# Altium PCB PDB_Rev1.PcbDoc (part 2 of 2)
Units mil, origin at the board's own origin, x right, y up, seen from the top; angles counter-clockwise.
Board outline 7157 x 4373 mil, 4 copper layers (Top Layer, Int1 (GND), Int2 (PWR), Bottom Layer), stack 53.912 mil thick; 59 components, 21 nets, 135 pads, 0 vias.
Unrouted connection lines stored in the file: 51.
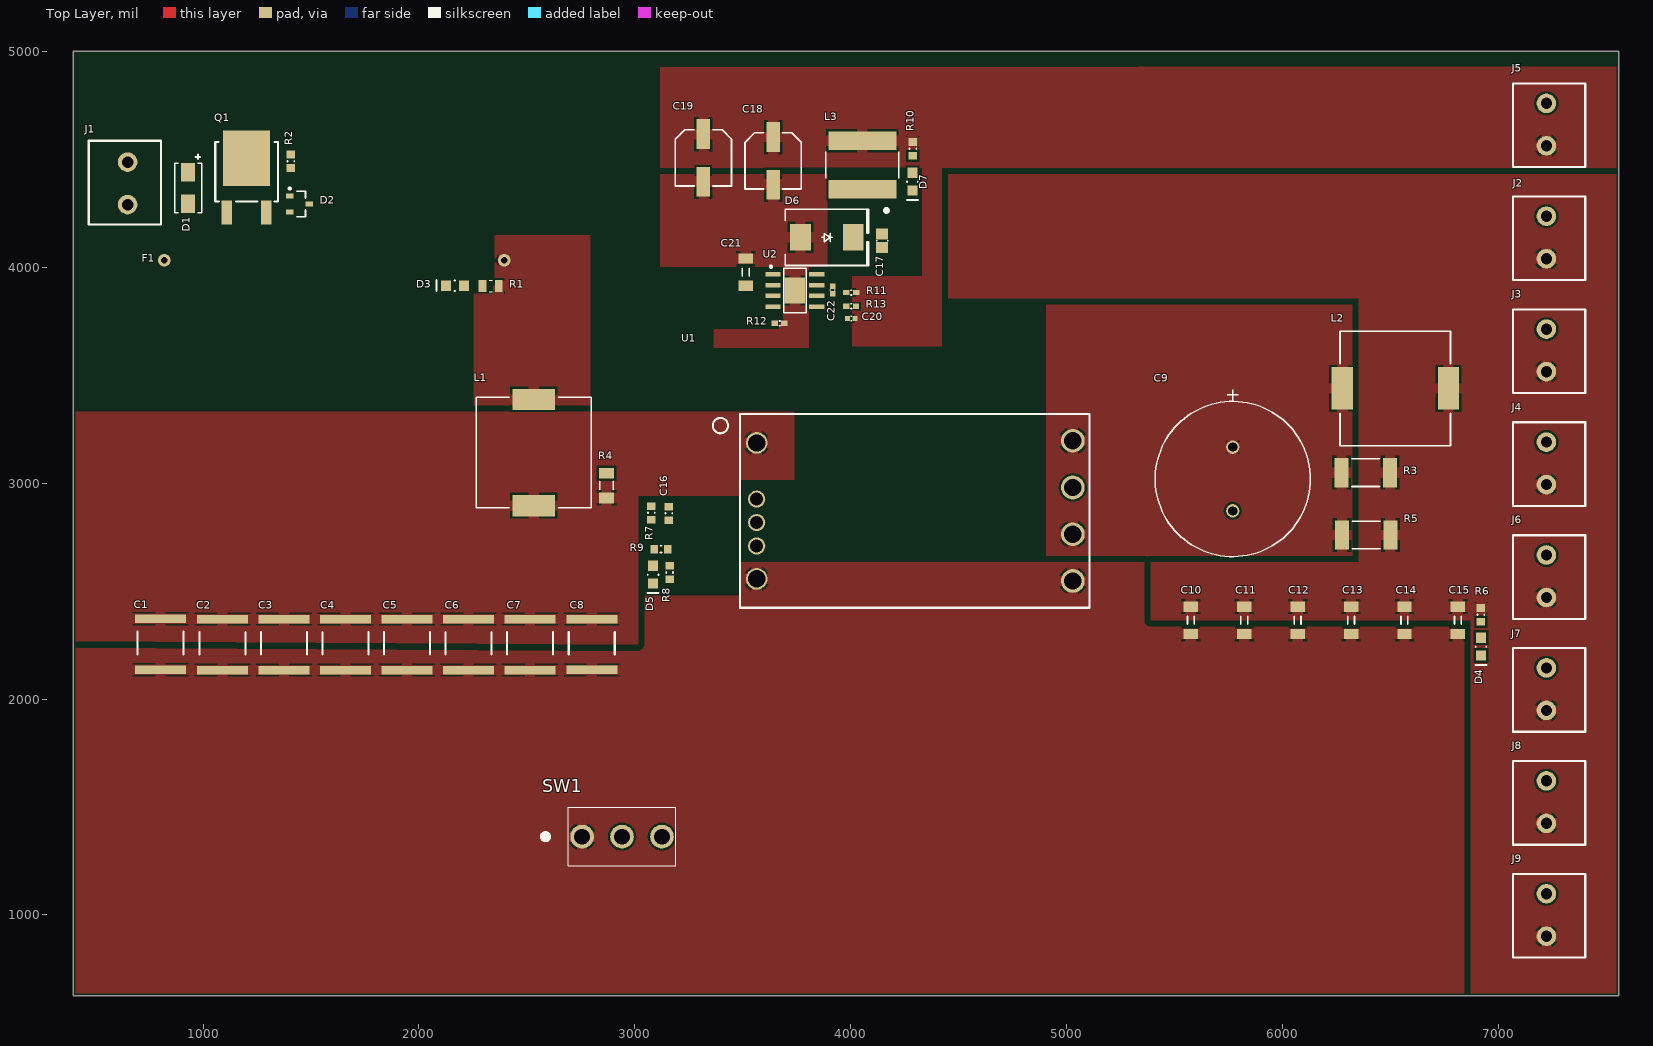
[diagram p0: Top Layer view]

## Part data (continued)
R11: "RES SMD 221K OHM 1% 1/10W 0402", Case/Package=0402, Case Code (Metric)=1005, Manufacturer 1=Panasonic, Max Operating Temperature=155°C, Max Power Dissipation=100mW, Min Operating Temperature=-55°C, Package Quantity=1, Resistance=221kO, Supplier Part Number 1=P221KLCT-ND, Temperature Coefficient=100ppm/°C, Tolerance=1%, Voltage Rating=50V, Case Code (Imperial)=0402, ComponentLink1Description=https://datasheet.ciiva.com/43467/1678782-43467510.pdf?src-supplier=Farnell, ComponentLink1URL=https://datasheet.ciiva.com/43467/1678782-43467510.pdf?src-supplier=Farnell, ComponentLink2Description=https://datasheet.ciiva.com/7712/1678782-7712808.pdf?src-supplier=Element14, ComponentLink2URL=https://datasheet.ciiva.com/7712/1678782-7712808.pdf?src-supplier=Element14, ComponentLink3Description=https://datasheet.ciiva.com/9184/aoa0000ce2-9184216.pdf?src-supplier=Avnet, ComponentLink3URL=https://datasheet.ciiva.com/9184/aoa0000ce2-9184216.pdf?src-supplier=Avnet, ComponentLink4Description=https://datasheet.ciiva.com/16514/aoa0000ce2-16514280.pdf?src-supplier=Avnet+Asia, ComponentLink4URL=https://datasheet.ciiva.com/16514/aoa0000ce2-16514280.pdf?src-supplier=Avnet+Asia, ComponentLink5Description=https://datasheet.ciiva.com/46373/1678782-46373065.pdf?src-supplier=Element14, ComponentLink5URL=https://datasheet.ciiva.com/46373/1678782-46373065.pdf?src-supplier=Element14, ComponentLink6Description=https://datasheet.ciiva.com/46373/1678782-46373066.pdf?src-supplier=Element14, ComponentLink6URL=https://datasheet.ciiva.com/46373/1678782-46373066.pdf?src-supplier=Element14, ComponentLink7Description=https://datasheet.ciiva.com/16777/70260748-16777838.pdf?src-supplier=Allied+Electronics, ComponentLink7URL=https://datasheet.ciiva.com/16777/70260748-16777838.pdf?src-supplier=Allied+Electronics, ComponentLink8Description=https://datasheet.ciiva.com/24026/aoa0000ce2-24026895.pdf?src-supplier=Mouser, ComponentLink8URL=https://datasheet.ciiva.com/24026/aoa0000ce2-24026895.pdf?src-supplier=Mouser, Composition="Thick Film", Contact Plating=Tin, Depth=0.5mm, Features="Automotive AEC-Q200", Height=0.016inch, Lead Free="Lead Free", Length=1mm, Manufacturer Part Number 1=ERJ-2RKF2213X, Military Standard=Not, Mount="Surface Mount", Number of Terminations=2, Packaging="Tape and Reel", Power Rating=100mW, Pricing 1="1=0.10000, 10=0.04100, 100=0.01660, 1000=0.00745, 2500=0.00646, 5000=0.00534 (USD)", REACH SVHC="No SVHC", RoHS=Yes, Stock 1=643641, Supplier 1=Digi-Key, Termination=SMD/SMT, Voltage Rating (DC)=50V, Width=0.02inch
R12: "RES SMD 13.7K OHM 1% 1/16W 0402", Case/Package=0402, Case Code (Metric)=1005, Manufacturer 1=Vishay, Max Operating Temperature=155°C, Min Operating Temperature=-55°C, Package Quantity=10000, Power Rating=63mW, Resistance=13.7kO, Supplier Part Number 1=541-13.7KLCT-ND, Temperature Coefficient=100ppm/°C, Tolerance=1%, Voltage Rating=50V, Case Code (Imperial)=0402, ComponentLink1Description=https://datasheet.ciiva.com/7664/1533075-7664006.pdf?src-supplier=Element14, ComponentLink1URL=https://datasheet.ciiva.com/7664/1533075-7664006.pdf?src-supplier=Element14, ComponentLink2Description=https://datasheet.ciiva.com/5561/dcrcwe3-109170-5561994.pdf?src-supplier=Mouser, ComponentLink2URL=https://datasheet.ciiva.com/5561/dcrcwe3-109170-5561994.pdf?src-supplier=Mouser, ComponentLink3Description=https://datasheet.ciiva.com/16775/70201119-16775342.pdf?src-supplier=Allied+Electronics, ComponentLink3URL=https://datasheet.ciiva.com/16775/70201119-16775342.pdf?src-supplier=Allied+Electronics, ComponentLink4Description=https://datasheet.ciiva.com/22871/70201119-22871774.pdf?src-supplier=Allied+Electronics, ComponentLink4URL=https://datasheet.ciiva.com/22871/70201119-22871774.pdf?src-supplier=Allied+Electronics, ComponentLink5Description=https://datasheet.ciiva.com/7663/1697337-7663831.pdf?src-supplier=Element14, ComponentLink5URL=https://datasheet.ciiva.com/7663/1697337-7663831.pdf?src-supplier=Element14, Composition="Thick Film", Contact Plating=Tin, Depth=0.5mm, Height=0.35mm, Lead Free="Lead Free", Length=1mm, Manufacturer Part Number 1=CRCW040213K7FKED, Military Standard=Not, Number of Pins=2, Packaging="Tape and Reel", Pricing 1="1=0.10000, 10=0.03600, 100=0.01460, 1000=0.00657, 2500=0.00570, 5000=0.00471 (USD)", Radiation Hardening=No, REACH SVHC=Unknown, RoHS=Yes, Stock 1=47823, Supplier 1=Digi-Key, Termination=SMD/SMT, Voltage Rating (DC)=50V, Weight=2.3E-05oz, Width=0.5mm
R13: "RES SMD 10.2K OHM 1% 1/16W 0402", Case/Package=0402, Case Code (Metric)=1005, Manufacturer 1=Vishay, Max Operating Temperature=155°C, Max Power Dissipation=63mW, Min Operating Temperature=-55°C, Package Quantity=10, Resistance=10.2kO, Supplier Part Number 1=541-10.2KLCT-ND, Temperature Coefficient=100ppm/°C, Tolerance=1%, Voltage Rating=50V, Case Code (Imperial)=0402, ComponentLink1Description=https://datasheet.ciiva.com/11810/0900766b80d98824-11810045.pdf?src-supplier=RSComponents, ComponentLink1URL=https://datasheet.ciiva.com/11810/0900766b80d98824-11810045.pdf?src-supplier=RSComponents, ComponentLink2Description=https://datasheet.ciiva.com/2525/dcrcwe3-2525638.pdf?src-supplier=Digi-Key, ComponentLink2URL=https://datasheet.ciiva.com/2525/dcrcwe3-2525638.pdf?src-supplier=Digi-Key, ComponentLink3Description=https://datasheet.ciiva.com/7369/1635184-7369334.pdf?src-supplier=Newark, ComponentLink3URL=https://datasheet.ciiva.com/7369/1635184-7369334.pdf?src-supplier=Newark, ComponentLink4Description=https://datasheet.ciiva.com/7663/1697337-7663814.pdf?src-supplier=Element14, ComponentLink4URL=https://datasheet.ciiva.com/7663/1697337-7663814.pdf?src-supplier=Element14, ComponentLink5Description=https://datasheet.ciiva.com/2525/dcrcwe3-2525639.pdf?src-supplier=Digi-Key, ComponentLink5URL=https://datasheet.ciiva.com/2525/dcrcwe3-2525639.pdf?src-supplier=Digi-Key, ComponentLink6Description=https://datasheet.ciiva.com/7663/1697337-7663815.pdf?src-supplier=Element14, ComponentLink6URL=https://datasheet.ciiva.com/7663/1697337-7663815.pdf?src-supplier=Element14, ComponentLink7Description=https://datasheet.ciiva.com/2525/dcrcwe3-2525640.pdf?src-supplier=Digi-Key, ComponentLink7URL=https://datasheet.ciiva.com/2525/dcrcwe3-2525640.pdf?src-supplier=Digi-Key, ComponentLink8Description=https://datasheet.ciiva.com/16881/dcrcwe3-16881433.pdf?src-supplier=Avnet+Europe, ComponentLink8URL=https://datasheet.ciiva.com/16881/dcrcwe3-16881433.pdf?src-supplier=Avnet+Europe, ComponentLink9Description=https://datasheet.ciiva.com/7743/125364-7743418.pdf?src-supplier=Element14, ComponentLink9URL=https://datasheet.ciiva.com/7743/125364-7743418.pdf?src-supplier=Element14, ComponentLink10Description=https://datasheet.ciiva.com/22870/70201119-22870522.pdf?src-supplier=Allied+Electronics, ComponentLink10URL=https://datasheet.ciiva.com/22870/70201119-22870522.pdf?src-supplier=Allied+Electronics, ComponentLink11Description=https://datasheet.ciiva.com/16772/70201119-16772093.pdf?src-supplier=Allied+Electronics, ComponentLink11URL=https://datasheet.ciiva.com/16772/70201119-16772093.pdf?src-supplier=Allied+Electronics, ComponentLink12Description=https://datasheet.ciiva.com/3255/dcrcwe3-3255966.pdf?src-supplier=Avnet, ComponentLink12URL=https://datasheet.ciiva.com/3255/dcrcwe3-3255966.pdf?src-supplier=Avnet, ComponentLink13Description=https://datasheet.ciiva.com/16394/dcrcwe3-16394143.pdf?src-supplier=Future+Electronics, ComponentLink13URL=https://datasheet.ciiva.com/16394/dcrcwe3-16394143.pdf?src-supplier=Future+Electronics, ComponentLink14Description=https://datasheet.ciiva.com/22702/1697337-22702863.pdf?src-supplier=Element14, ComponentLink14URL=https://datasheet.ciiva.com/22702/1697337-22702863.pdf?src-supplier=Element14, Composition="Thick Film", Contact Plating=Tin, Depth=0.5mm, Features="Automotive AEC-Q200", Height=0.35mm, Length=1mm, Manufacturer Part Number 1=CRCW040210K2FKED, Military Standard=Not, Mount="Surface Mount", Number of Pins=2, Number of Terminations=2, Packaging="Tape and Reel", Power Rating=63mW, Pricing 1="1=0.10000, 10=0.03600, 100=0.01460, 1000=0.00657, 2500=0.00570, 5000=0.00471 (USD)", Radiation Hardening=No, REACH SVHC=Unknown, RoHS=Yes, Stock 1=5325, Supplier 1=Digi-Key, Termination=SMD/SMT, Weight=2.3E-05oz, Width=0.5mm
SW1: "SWITCH TOGGLE SPDT 5A 120V", Current Rating=5A, Manufacturer 1=E-Switch, Manufacturer Part Number 1=100SP1T1B4M2QE, Max Operating Temperature=85°C, Min Operating Temperature=-30°C, Package Quantity=1, Supplier Part Number 1=EG2355-ND, Voltage Rating (AC)=120V, Voltage Rating (DC)=28V, Actuator Length=12.19mm, Actuator Material=Brass,Chrome, Actuator Type="Standard Round", ComponentLink1Description=https://datasheet.ciiva.com/24455/t111597-24455739.pdf?src-supplier=Onlinecomponents.com, ComponentLink1URL=https://datasheet.ciiva.com/24455/t111597-24455739.pdf?src-supplier=Onlinecomponents.com, ComponentLink2Description=https://datasheet.ciiva.com/2905/t111597-2905494.pdf?src-supplier=Digi-Key, ComponentLink2URL=https://datasheet.ciiva.com/2905/t111597-2905494.pdf?src-supplier=Digi-Key, Contact Material=Silver, Contact Plating=Silver, Electrical Life=40000Cycles, Illumination Type=Non-Illuminated,Illuminated, Lead Free="Lead Free", Mount="Through Hole", Orientation=Vertical, Packaging=Bulk, Pricing 1="1=1.99000, 10=1.77900, 25=1.68240, 50=1.60200, 100=1.52950, 250=1.46512, 500=1.36850, 1000=1.30410 (USD)", RoHS=Yes, Stock 1=4845, Supplier 1=Digi-Key, Switch Function=On-On, Termination="PC Pin", Throw Configuration=SPDT
U2: "Buck, 40V, 5A  2.2MHz Step-Down Regulator with 40µA IQ 8-SO PowerPAD -40 to 125", Case/Package=8-PowerSOIC, Manufacturer 1="Texas Instruments", Max Input Voltage=40V, Max Operating Temperature=125°C, Max Output Voltage=28V, Min Input Voltage=4V, Min Operating Temperature=-40°C, Min Output Voltage=800mV, Output Current=5A, Quiescent Current=40uA, Supplier Part Number 1=296-44322-1-ND, Switching Frequency=2.5MHz, ComponentLink1Description=http://www.ti.com/general/docs/lit/getliterature.tsp?genericPartNumber=LMR14050&&fileType=pdf&src-supplier=Avnet, ComponentLink1URL=http://www.ti.com/general/docs/lit/getliterature.tsp?genericPartNumber=LMR14050&&fileType=pdf&src-supplier=Avnet, ComponentLink2Description=http://www.ti.com/lit/ds/symlink/lmr14050.pdf?src-supplier=Digi-Key, ComponentLink2URL=http://www.ti.com/lit/ds/symlink/lmr14050.pdf?src-supplier=Digi-Key, ComponentLink3Description=http://www.ti.com/general/docs/suppproductinfo.tsp?distId=10&amp;gotoUrl=http%3A%2F%2Fwww.ti.com%2Flit%2Fgpn%2Flmr14050&src-supplier=Digi-Key, ComponentLink3URL=http://www.ti.com/general/docs/suppproductinfo.tsp?distId=10&amp;gotoUrl=http%3A%2F%2Fwww.ti.com%2Flit%2Fgpn%2Flmr14050&src-supplier=Digi-Key, Lead Free="Lead Free", Manufacturer Part Number 1=LMR14050SDDAR, Mount="Surface Mount", Number Of Outputs=1, Number of Pins=8, Output Configuration=Positive, Output Type=Adjustable, Packaging="Cut Tape", Pricing 1="1=2.80000, 10=2.51300, 25=2.37600, 100=1.95360, 250=1.75296, 500=1.68960, 1000=1.40448 (USD)", RoHS=Yes, Stock 1=5816, Supplier 1=Digi-Key, Synchronous Rectifier=No

## Nets (pads, with @x,y where several pads share a name; then routed paths per layer and width w, separated by ;. In a path a pad name is that pad's centre, name@x,y a point inside that pad or via, vN(x,y) a via of type N, cw(c..) or ccw(c..) an arc to the next point about the centre after c; other vN are vias at no path point)
+5V: C10.2 C11.2 C12.2 C13.2 C14.2 C15.2 J2.1 J3.1 J4.1 J6.1 J7.1 J8.1 J9.1 L2.2 R3.2 R5.2 R6.2
+17V: C18.1 C19.1 C20.2 J5.1 L3.2 R10.2 R11.2
+IN: C1.2 C2.2 C3.2 C4.2 C5.2 C6.2 C7.2 C8.2 L1.2 R4.2 U1.A
+OUT: C9.1 L2.1 R3.1 R5.1 U1.A' U1.C'
BOOT: C17.2 U2.1
EN: C16.2 R7.2 U1.C
FB: C20.1 R11.1 R13.2 U2.5
FT: R8.1 R9.2 U1.D
GND: C1.1 C2.1 C3.1 C4.1 C5.1 C6.1 C7.1 C8.1 C9.2 C10.1 C11.1 C12.1 C13.1 C14.1 C15.1 C16.1 C18.2 C19.2 C21.2 C22.1 D1.1 D3.2 D4.2 D5.2 D6.1 D7.2 J1.1 J2.2 J3.2 J4.2 J5.2 J6.2 J7.2 J8.2 J9.2 R2.1 R8.2 R12.1 R13.1 SW1.1 U1.B' U1.D' U1.E U2.7 U2.9
NetD2_1: D2.1 Q1.1 R2.2
NetD2_2: D2.2 F1.1 Q1.3
NetD3_1: D3.1 R1.1
NetD4_1: D4.1 R6.1
NetD5_1: D5.1 R9.1
NetD7_1: D7.1 R10.1
NetR7_1: R7.1 SW1.2
RT/SYNC: R12.2 U2.4
SS: C22.2 U2.6
SW: C17.1 D6.2 L3.1 U2.8
VBAT: D1.2 J1.2 Q1.2
VBAT_FUSED: C21.1 F1.2 L1.1 R1.2 R4.1 U2.2 U2.3
pads on no net: D2.3 SW1.3 U1.B

## Polygon pours and split planes (outlines as drawn)
VBAT_FUSED on Top Layer "Top Layer-VBAT_FUSED" (solid, pour order 22): 2352.64,3876.83 2255,3876.83 2255,3303 2794,3303 2794,4148 2352,4148
no net on Top Layer "Top Layer-No Net 4" (solid, pour order 20): 311,15490
GND on Top Layer "Top Layer-GND 1" (solid, pour order 18): 3891,4463 3891,4003 3805,4003 3805,3628 3366,3628 3366,3713 3687,3713 3687,3770 3688,3770 3688,4003 3117,4003 3117,4463
+OUT on Top Layer "Top Layer-+OUT" (solid, pour order 14): 4906,2603 6354,2603 6354,3856 4906,3856
GND on Top Layer "Top Layer-GND" (solid, pour order 12): 3016,2479 3485,2479 3485,2634 5389,2634 5389,2365 6873,2365 6873,627 400,627 400,2248.21 3016,2248.21
+17V on Top Layer "Top Layer-+17V" (solid, pour order 8): 4331,4461.5 4331,3958 4007,3958 4007,3634 4423,3634 4423,4461.5 7557,4461.5 7557,4932 3117,4926.5 3117,4461.5
+5V on Top Layer "Top Layer-No Net" (solid, pour order 10): 7557,4459 4423,4459 4423,3858 6354,3858 6354,2634 5390,2634 5390,2365 6873,2365 6873,627 7557,627
no net on Top Layer "Top Layer-No Net 1" (solid, pour order 6): 2892,3065
no net on Top Layer "Top Layer-No Net 2" (solid, pour order 4): 2911,2999
no net on Top Layer "Top Layer-No Net 3" (solid, pour order 2): 2898,3055
+IN on Top Layer "+IN" (solid, pour order 0): 400,3331 400,2268.62 3016,2252 3016,2941 3486,2941 3486,3016 3739,3016 3739,3331
no net on Int1 (GND) (split plane): 7536.9,647.1 420.1,647.1 420.1,4979.9 7536.9,4979.9
no net on Int2 (PWR) (split plane): 7536.9,647.1 420.1,647.1 420.1,4979.9 7536.9,4979.9